# Altium PCB FPC_15015_0451.PcbDoc
Units mil, origin at the board's own origin, x right, y up, seen from the top; angles counter-clockwise.
Board outline 4000 x 614.17 mil, 1 copper layers (Top Layer), stack 2.48 mil thick; 2 components, 51 nets, 102 pads, 0 vias.
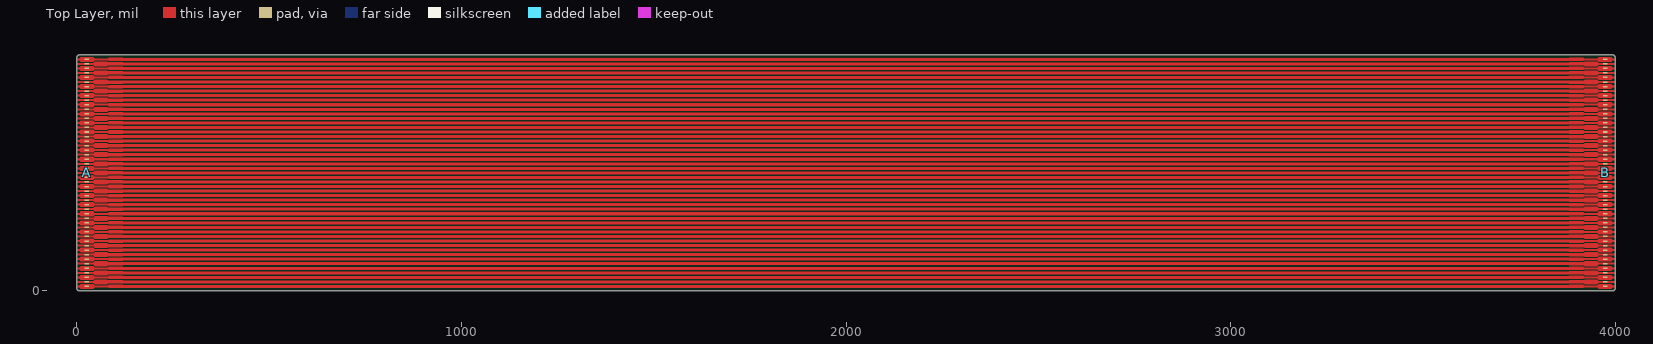
[diagram p0: Top Layer view]
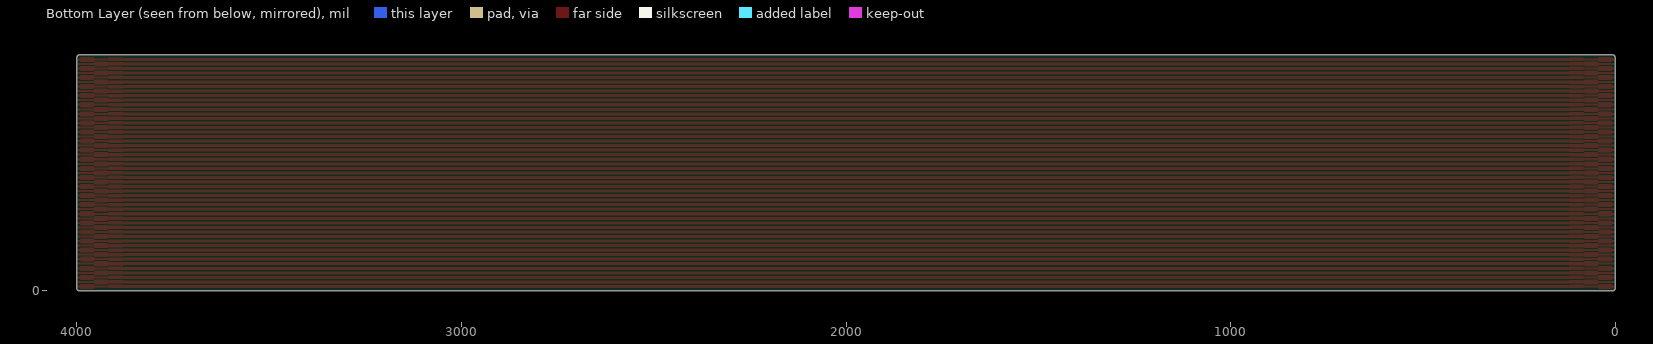
[diagram p1: Bottom Layer view, seen from below]

## Layer stack, top to bottom
Top Solder: solder mask 1.9685, Polyimide coverlay + adhesive, Dk 3.5
Top Layer: signal copper 0.7087
Polyimide base + adhesive: dielectric 1.7717, Polyimide + adhesive, Dk 3.5

## Board outline
7.87,0 3992.13,0 ccw(c3992.13,7.87) 4000,7.87 4000,606.3 ccw(c3992.13,606.3) 3992.13,614.17 7.87,614.17 ccw(c7.87,606.3) 0,606.3 0,7.87 ccw(c7.87,7.87)

## Design rules (kind name [scope] priority, off if disabled: settings)
Clearance [All] p1: gap=2.78 ignorepadtopadclearanceinfootprint=FALSE // Molex staggered fingers: nominal diagonal gap 0.0707107 mm; 0.10 mm straight gap.
PolygonConnect [All] p1: connectstyle=Relief reliefconductorwidth=10 reliefentries=4 polygonreliefangle="90 Angle" airgapwidth=10
RoutingVias [All] p1: holewidth=28 width=50 viastyle="Through Hole" minholewidth=28 minwidth=50 maxholewidth=28 maxwidth=50
SolderMaskExpansion [All] p1: expansion=0 istentingtop=FALSE
Width [All] p1: maxlimit=11.81 minlimit=3.94 preferedwidth=7.87 minimp=50.000000 maximp=50.000000 favimp=50.000000
30 further rules are at their usual default settings.

## Components (designator, comment, footprint, x,y, rotation, side; value= is the part's Value field where it differs from the comment)
A "Integral same-face cable contacts" FPC51_P030_STAGGERED#1 0,307.09 r0 top
B "Integral same-face cable contacts" FPC51_P030_STAGGERED#2 4000,307.09 r0 top

## Footprints (in the part's own frame and the unit in brackets; to place one, negate y for a bottom-side part, rotate by r counter-clockwise, add the part's x,y. Pads: shape width x height; smd on the part's side, far side on the other; paste and mask are expansions set on the pad)
FPC51_P030_STAGGERED#1 [mm]
  rect 0.3x0.1 smd paste-2539.97 mask+0: 1(0.65,-7.5) 2(0.65,-7.2) 3(0.65,-6.9) 4(0.65,-6.6) 5(0.65,-6.3) 6(0.65,-6) 7(0.65,-5.7) 8(0.65,-5.4) 9(0.65,-5.1) 10(0.65,-4.8) 11(0.65,-4.5) 12(0.65,-4.2) 13(0.65,-3.9) 14(0.65,-3.6) 15(0.65,-3.3) 16(0.65,-3) 17(0.65,-2.7) 18(0.65,-2.4) 19(0.65,-2.1) 20(0.65,-1.8) 21(0.65,-1.5) 22(0.65,-1.2) 23(0.65,-0.9) 24(0.65,-0.6) 25(0.65,-0.3) 26(0.65,0) 27(0.65,0.3) 28(0.65,0.6) 29(0.65,0.9) 30(0.65,1.2) 31(0.65,1.5) 32(0.65,1.8) 33(0.65,2.1) 34(0.65,2.4) 35(0.65,2.7) 36(0.65,3) 37(0.65,3.3) 38(0.65,3.6) 39(0.65,3.9) 40(0.65,4.2) 41(0.65,4.5) 42(0.65,4.8) 43(0.65,5.1) 44(0.65,5.4) 45(0.65,5.7) 46(0.65,6) 47(0.65,6.3) 48(0.65,6.6) 49(0.65,6.9) 50(0.65,7.2) 51(0.65,7.5)
  Top Layer region: 0,7.55 0.15,7.55 0.25,7.65 1.1,7.65 1.2,7.55 2,7.55 2.1,7.6 3.05,7.6 3.05,7.4 2.1,7.4 2,7.45 1.2,7.45 1.1,7.35 0.25,7.35 0.15,7.45 0,7.45
  Top Layer region: 0,7.25 1.1,7.25 1.2,7.35 2,7.35 2.1,7.3 3.05,7.3 3.05,7.1 2.1,7.1 2,7.05 1.2,7.05 1.1,7.15 0,7.15
  Top Layer region: 0,6.95 0.15,6.95 0.25,7.05 1.1,7.05 1.2,6.95 2,6.95 2.1,7 3.05,7 3.05,6.8 2.1,6.8 2,6.85 1.2,6.85 1.1,6.75 0.25,6.75 0.15,6.85 0,6.85
  Top Layer region: 0,6.65 1.1,6.65 1.2,6.75 2,6.75 2.1,6.7 3.05,6.7 3.05,6.5 2.1,6.5 2,6.45 1.2,6.45 1.1,6.55 0,6.55
  Top Layer region: 0,6.35 0.15,6.35 0.25,6.45 1.1,6.45 1.2,6.35 2,6.35 2.1,6.4 3.05,6.4 3.05,6.2 2.1,6.2 2,6.25 1.2,6.25 1.1,6.15 0.25,6.15 0.15,6.25 0,6.25
  Top Layer region: 0,6.05 1.1,6.05 1.2,6.15 2,6.15 2.1,6.1 3.05,6.1 3.05,5.9 2.1,5.9 2,5.85 1.2,5.85 1.1,5.95 0,5.95
  Top Layer region: 0,5.75 0.15,5.75 0.25,5.85 1.1,5.85 1.2,5.75 2,5.75 2.1,5.8 3.05,5.8 3.05,5.6 2.1,5.6 2,5.65 1.2,5.65 1.1,5.55 0.25,5.55 0.15,5.65 0,5.65
  Top Layer region: 0,5.45 1.1,5.45 1.2,5.55 2,5.55 2.1,5.5 3.05,5.5 3.05,5.3 2.1,5.3 2,5.25 1.2,5.25 1.1,5.35 0,5.35
  Top Layer region: 0,5.15 0.15,5.15 0.25,5.25 1.1,5.25 1.2,5.15 2,5.15 2.1,5.2 3.05,5.2 3.05,5 2.1,5 2,5.05 1.2,5.05 1.1,4.95 0.25,4.95 0.15,5.05 0,5.05
  Top Layer region: 0,4.85 1.1,4.85 1.2,4.95 2,4.95 2.1,4.9 3.05,4.9 3.05,4.7 2.1,4.7 2,4.65 1.2,4.65 1.1,4.75 0,4.75
  Top Layer region: 0,4.55 0.15,4.55 0.25,4.65 1.1,4.65 1.2,4.55 2,4.55 2.1,4.6 3.05,4.6 3.05,4.4 2.1,4.4 2,4.45 1.2,4.45 1.1,4.35 0.25,4.35 0.15,4.45 0,4.45
  Top Layer region: 0,4.25 1.1,4.25 1.2,4.35 2,4.35 2.1,4.3 3.05,4.3 3.05,4.1 2.1,4.1 2,4.05 1.2,4.05 1.1,4.15 0,4.15
  Top Layer region: 0,3.95 0.15,3.95 0.25,4.05 1.1,4.05 1.2,3.95 2,3.95 2.1,4 3.05,4 3.05,3.8 2.1,3.8 2,3.85 1.2,3.85 1.1,3.75 0.25,3.75 0.15,3.85 0,3.85
  Top Layer region: 0,3.65 1.1,3.65 1.2,3.75 2,3.75 2.1,3.7 3.05,3.7 3.05,3.5 2.1,3.5 2,3.45 1.2,3.45 1.1,3.55 0,3.55
  Top Layer region: 0,3.35 0.15,3.35 0.25,3.45 1.1,3.45 1.2,3.35 2,3.35 2.1,3.4 3.05,3.4 3.05,3.2 2.1,3.2 2,3.25 1.2,3.25 1.1,3.15 0.25,3.15 0.15,3.25 0,3.25
  Top Layer region: 0,3.05 1.1,3.05 1.2,3.15 2,3.15 2.1,3.1 3.05,3.1 3.05,2.9 2.1,2.9 2,2.85 1.2,2.85 1.1,2.95 0,2.95
  Top Layer region: 0,2.75 0.15,2.75 0.25,2.85 1.1,2.85 1.2,2.75 2,2.75 2.1,2.8 3.05,2.8 3.05,2.6 2.1,2.6 2,2.65 1.2,2.65 1.1,2.55 0.25,2.55 0.15,2.65 0,2.65
  Top Layer region: 0,2.45 1.1,2.45 1.2,2.55 2,2.55 2.1,2.5 3.05,2.5 3.05,2.3 2.1,2.3 2,2.25 1.2,2.25 1.1,2.35 0,2.35
  Top Layer region: 0,2.15 0.15,2.15 0.25,2.25 1.1,2.25 1.2,2.15 2,2.15 2.1,2.2 3.05,2.2 3.05,2 2.1,2 2,2.05 1.2,2.05 1.1,1.95 0.25,1.95 0.15,2.05 0,2.05
  Top Layer region: 0,1.85 1.1,1.85 1.2,1.95 2,1.95 2.1,1.9 3.05,1.9 3.05,1.7 2.1,1.7 2,1.65 1.2,1.65 1.1,1.75 0,1.75
  Top Layer region: 0,1.55 0.15,1.55 0.25,1.65 1.1,1.65 1.2,1.55 2,1.55 2.1,1.6 3.05,1.6 3.05,1.4 2.1,1.4 2,1.45 1.2,1.45 1.1,1.35 0.25,1.35 0.15,1.45 0,1.45
  Top Layer region: 0,1.25 1.1,1.25 1.2,1.35 2,1.35 2.1,1.3 3.05,1.3 3.05,1.1 2.1,1.1 2,1.05 1.2,1.05 1.1,1.15 0,1.15
  Top Layer region: 0,0.95 0.15,0.95 0.25,1.05 1.1,1.05 1.2,0.95 2,0.95 2.1,1 3.05,1 3.05,0.8 2.1,0.8 2,0.85 1.2,0.85 1.1,0.75 0.25,0.75 0.15,0.85 0,0.85
  Top Layer region: 0,0.65 1.1,0.65 1.2,0.75 2,0.75 2.1,0.7 3.05,0.7 3.05,0.5 2.1,0.5 2,0.45 1.2,0.45 1.1,0.55 0,0.55
  Top Layer region: 0,0.35 0.15,0.35 0.25,0.45 1.1,0.45 1.2,0.35 2,0.35 2.1,0.4 3.05,0.4 3.05,0.2 2.1,0.2 2,0.25 1.2,0.25 1.1,0.15 0.25,0.15 0.15,0.25 0,0.25
  Top Layer region: 0,0.05 1.1,0.05 1.2,0.15 2,0.15 2.1,0.1 3.05,0.1 3.05,-0.1 2.1,-0.1 2,-0.15 1.2,-0.15 1.1,-0.05 0,-0.05
  Top Layer region: 0,-0.25 0.15,-0.25 0.25,-0.15 1.1,-0.15 1.2,-0.25 2,-0.25 2.1,-0.2 3.05,-0.2 3.05,-0.4 2.1,-0.4 2,-0.35 1.2,-0.35 1.1,-0.45 0.25,-0.45 0.15,-0.35 0,-0.35
  Top Layer region: 0,-0.55 1.1,-0.55 1.2,-0.45 2,-0.45 2.1,-0.5 3.05,-0.5 3.05,-0.7 2.1,-0.7 2,-0.75 1.2,-0.75 1.1,-0.65 0,-0.65
  Top Layer region: 0,-0.85 0.15,-0.85 0.25,-0.75 1.1,-0.75 1.2,-0.85 2,-0.85 2.1,-0.8 3.05,-0.8 3.05,-1 2.1,-1 2,-0.95 1.2,-0.95 1.1,-1.05 0.25,-1.05 0.15,-0.95 0,-0.95
  Top Layer region: 0,-1.15 1.1,-1.15 1.2,-1.05 2,-1.05 2.1,-1.1 3.05,-1.1 3.05,-1.3 2.1,-1.3 2,-1.35 1.2,-1.35 1.1,-1.25 0,-1.25
  Top Layer region: 0,-1.45 0.15,-1.45 0.25,-1.35 1.1,-1.35 1.2,-1.45 2,-1.45 2.1,-1.4 3.05,-1.4 3.05,-1.6 2.1,-1.6 2,-1.55 1.2,-1.55 1.1,-1.65 0.25,-1.65 0.15,-1.55 0,-1.55
  Top Layer region: 0,-1.75 1.1,-1.75 1.2,-1.65 2,-1.65 2.1,-1.7 3.05,-1.7 3.05,-1.9 2.1,-1.9 2,-1.95 1.2,-1.95 1.1,-1.85 0,-1.85
  Top Layer region: 0,-2.05 0.15,-2.05 0.25,-1.95 1.1,-1.95 1.2,-2.05 2,-2.05 2.1,-2 3.05,-2 3.05,-2.2 2.1,-2.2 2,-2.15 1.2,-2.15 1.1,-2.25 0.25,-2.25 0.15,-2.15 0,-2.15
  Top Layer region: 0,-2.35 1.1,-2.35 1.2,-2.25 2,-2.25 2.1,-2.3 3.05,-2.3 3.05,-2.5 2.1,-2.5 2,-2.55 1.2,-2.55 1.1,-2.45 0,-2.45
  Top Layer region: 0,-2.65 0.15,-2.65 0.25,-2.55 1.1,-2.55 1.2,-2.65 2,-2.65 2.1,-2.6 3.05,-2.6 3.05,-2.8 2.1,-2.8 2,-2.75 1.2,-2.75 1.1,-2.85 0.25,-2.85 0.15,-2.75 0,-2.75
  Top Layer region: 0,-2.95 1.1,-2.95 1.2,-2.85 2,-2.85 2.1,-2.9 3.05,-2.9 3.05,-3.1 2.1,-3.1 2,-3.15 1.2,-3.15 1.1,-3.05 0,-3.05
  Top Layer region: 0,-3.25 0.15,-3.25 0.25,-3.15 1.1,-3.15 1.2,-3.25 2,-3.25 2.1,-3.2 3.05,-3.2 3.05,-3.4 2.1,-3.4 2,-3.35 1.2,-3.35 1.1,-3.45 0.25,-3.45 0.15,-3.35 0,-3.35
  Top Layer region: 0,-3.55 1.1,-3.55 1.2,-3.45 2,-3.45 2.1,-3.5 3.05,-3.5 3.05,-3.7 2.1,-3.7 2,-3.75 1.2,-3.75 1.1,-3.65 0,-3.65
  Top Layer region: 0,-3.85 0.15,-3.85 0.25,-3.75 1.1,-3.75 1.2,-3.85 2,-3.85 2.1,-3.8 3.05,-3.8 3.05,-4 2.1,-4 2,-3.95 1.2,-3.95 1.1,-4.05 0.25,-4.05 0.15,-3.95 0,-3.95
  Top Layer region: 0,-4.15 1.1,-4.15 1.2,-4.05 2,-4.05 2.1,-4.1 3.05,-4.1 3.05,-4.3 2.1,-4.3 2,-4.35 1.2,-4.35 1.1,-4.25 0,-4.25
  Top Layer region: 0,-4.45 0.15,-4.45 0.25,-4.35 1.1,-4.35 1.2,-4.45 2,-4.45 2.1,-4.4 3.05,-4.4 3.05,-4.6 2.1,-4.6 2,-4.55 1.2,-4.55 1.1,-4.65 0.25,-4.65 0.15,-4.55 0,-4.55
  Top Layer region: 0,-4.75 1.1,-4.75 1.2,-4.65 2,-4.65 2.1,-4.7 3.05,-4.7 3.05,-4.9 2.1,-4.9 2,-4.95 1.2,-4.95 1.1,-4.85 0,-4.85
  Top Layer region: 0,-5.05 0.15,-5.05 0.25,-4.95 1.1,-4.95 1.2,-5.05 2,-5.05 2.1,-5 3.05,-5 3.05,-5.2 2.1,-5.2 2,-5.15 1.2,-5.15 1.1,-5.25 0.25,-5.25 0.15,-5.15 0,-5.15
  Top Layer region: 0,-5.35 1.1,-5.35 1.2,-5.25 2,-5.25 2.1,-5.3 3.05,-5.3 3.05,-5.5 2.1,-5.5 2,-5.55 1.2,-5.55 1.1,-5.45 0,-5.45
  Top Layer region: 0,-5.65 0.15,-5.65 0.25,-5.55 1.1,-5.55 1.2,-5.65 2,-5.65 2.1,-5.6 3.05,-5.6 3.05,-5.8 2.1,-5.8 2,-5.75 1.2,-5.75 1.1,-5.85 0.25,-5.85 0.15,-5.75 0,-5.75
  Top Layer region: 0,-5.95 1.1,-5.95 1.2,-5.85 2,-5.85 2.1,-5.9 3.05,-5.9 3.05,-6.1 2.1,-6.1 2,-6.15 1.2,-6.15 1.1,-6.05 0,-6.05
  Top Layer region: 0,-6.25 0.15,-6.25 0.25,-6.15 1.1,-6.15 1.2,-6.25 2,-6.25 2.1,-6.2 3.05,-6.2 3.05,-6.4 2.1,-6.4 2,-6.35 1.2,-6.35 1.1,-6.45 0.25,-6.45 0.15,-6.35 0,-6.35
  Top Layer region: 0,-6.55 1.1,-6.55 1.2,-6.45 2,-6.45 2.1,-6.5 3.05,-6.5 3.05,-6.7 2.1,-6.7 2,-6.75 1.2,-6.75 1.1,-6.65 0,-6.65
  Top Layer region: 0,-6.85 0.15,-6.85 0.25,-6.75 1.1,-6.75 1.2,-6.85 2,-6.85 2.1,-6.8 3.05,-6.8 3.05,-7 2.1,-7 2,-6.95 1.2,-6.95 1.1,-7.05 0.25,-7.05 0.15,-6.95 0,-6.95
  Top Layer region: 0,-7.15 1.1,-7.15 1.2,-7.05 2,-7.05 2.1,-7.1 3.05,-7.1 3.05,-7.3 2.1,-7.3 2,-7.35 1.2,-7.35 1.1,-7.25 0,-7.25
  Top Layer region: 0,-7.45 0.15,-7.45 0.25,-7.35 1.1,-7.35 1.2,-7.45 2,-7.45 2.1,-7.4 3.05,-7.4 3.05,-7.6 2.1,-7.6 2,-7.55 1.2,-7.55 1.1,-7.65 0.25,-7.65 0.15,-7.55 0,-7.55
FPC51_P030_STAGGERED#2 [mm]
  rect 0.3x0.1 smd paste-2539.97 mask+0: 1(-0.65,-7.5) 2(-0.65,-7.2) 3(-0.65,-6.9) 4(-0.65,-6.6) 5(-0.65,-6.3) 6(-0.65,-6) 7(-0.65,-5.7) 8(-0.65,-5.4) 9(-0.65,-5.1) 10(-0.65,-4.8) 11(-0.65,-4.5) 12(-0.65,-4.2) 13(-0.65,-3.9) 14(-0.65,-3.6) 15(-0.65,-3.3) 16(-0.65,-3) 17(-0.65,-2.7) 18(-0.65,-2.4) 19(-0.65,-2.1) 20(-0.65,-1.8) 21(-0.65,-1.5) 22(-0.65,-1.2) 23(-0.65,-0.9) 24(-0.65,-0.6) 25(-0.65,-0.3) 26(-0.65,0) 27(-0.65,0.3) 28(-0.65,0.6) 29(-0.65,0.9) 30(-0.65,1.2) 31(-0.65,1.5) 32(-0.65,1.8) 33(-0.65,2.1) 34(-0.65,2.4) 35(-0.65,2.7) 36(-0.65,3) 37(-0.65,3.3) 38(-0.65,3.6) 39(-0.65,3.9) 40(-0.65,4.2) 41(-0.65,4.5) 42(-0.65,4.8) 43(-0.65,5.1) 44(-0.65,5.4) 45(-0.65,5.7) 46(-0.65,6) 47(-0.65,6.3) 48(-0.65,6.6) 49(-0.65,6.9) 50(-0.65,7.2) 51(-0.65,7.5)
  Top Layer region: 0,7.55 -0.15,7.55 -0.25,7.65 -1.1,7.65 -1.2,7.55 -2,7.55 -2.1,7.6 -3.05,7.6 -3.05,7.4 -2.1,7.4 -2,7.45 -1.2,7.45 -1.1,7.35 -0.25,7.35 -0.15,7.45 0,7.45
  Top Layer region: 0,7.25 -1.1,7.25 -1.2,7.35 -2,7.35 -2.1,7.3 -3.05,7.3 -3.05,7.1 -2.1,7.1 -2,7.05 -1.2,7.05 -1.1,7.15 0,7.15
  Top Layer region: 0,6.95 -0.15,6.95 -0.25,7.05 -1.1,7.05 -1.2,6.95 -2,6.95 -2.1,7 -3.05,7 -3.05,6.8 -2.1,6.8 -2,6.85 -1.2,6.85 -1.1,6.75 -0.25,6.75 -0.15,6.85 0,6.85
  Top Layer region: 0,6.65 -1.1,6.65 -1.2,6.75 -2,6.75 -2.1,6.7 -3.05,6.7 -3.05,6.5 -2.1,6.5 -2,6.45 -1.2,6.45 -1.1,6.55 0,6.55
  Top Layer region: 0,6.35 -0.15,6.35 -0.25,6.45 -1.1,6.45 -1.2,6.35 -2,6.35 -2.1,6.4 -3.05,6.4 -3.05,6.2 -2.1,6.2 -2,6.25 -1.2,6.25 -1.1,6.15 -0.25,6.15 -0.15,6.25 0,6.25
  Top Layer region: 0,6.05 -1.1,6.05 -1.2,6.15 -2,6.15 -2.1,6.1 -3.05,6.1 -3.05,5.9 -2.1,5.9 -2,5.85 -1.2,5.85 -1.1,5.95 0,5.95
  Top Layer region: 0,5.75 -0.15,5.75 -0.25,5.85 -1.1,5.85 -1.2,5.75 -2,5.75 -2.1,5.8 -3.05,5.8 -3.05,5.6 -2.1,5.6 -2,5.65 -1.2,5.65 -1.1,5.55 -0.25,5.55 -0.15,5.65 0,5.65
  Top Layer region: 0,5.45 -1.1,5.45 -1.2,5.55 -2,5.55 -2.1,5.5 -3.05,5.5 -3.05,5.3 -2.1,5.3 -2,5.25 -1.2,5.25 -1.1,5.35 0,5.35
  Top Layer region: 0,5.15 -0.15,5.15 -0.25,5.25 -1.1,5.25 -1.2,5.15 -2,5.15 -2.1,5.2 -3.05,5.2 -3.05,5 -2.1,5 -2,5.05 -1.2,5.05 -1.1,4.95 -0.25,4.95 -0.15,5.05 0,5.05
  Top Layer region: 0,4.85 -1.1,4.85 -1.2,4.95 -2,4.95 -2.1,4.9 -3.05,4.9 -3.05,4.7 -2.1,4.7 -2,4.65 -1.2,4.65 -1.1,4.75 0,4.75
  Top Layer region: 0,4.55 -0.15,4.55 -0.25,4.65 -1.1,4.65 -1.2,4.55 -2,4.55 -2.1,4.6 -3.05,4.6 -3.05,4.4 -2.1,4.4 -2,4.45 -1.2,4.45 -1.1,4.35 -0.25,4.35 -0.15,4.45 0,4.45
  Top Layer region: 0,4.25 -1.1,4.25 -1.2,4.35 -2,4.35 -2.1,4.3 -3.05,4.3 -3.05,4.1 -2.1,4.1 -2,4.05 -1.2,4.05 -1.1,4.15 0,4.15
  Top Layer region: 0,3.95 -0.15,3.95 -0.25,4.05 -1.1,4.05 -1.2,3.95 -2,3.95 -2.1,4 -3.05,4 -3.05,3.8 -2.1,3.8 -2,3.85 -1.2,3.85 -1.1,3.75 -0.25,3.75 -0.15,3.85 0,3.85
  Top Layer region: 0,3.65 -1.1,3.65 -1.2,3.75 -2,3.75 -2.1,3.7 -3.05,3.7 -3.05,3.5 -2.1,3.5 -2,3.45 -1.2,3.45 -1.1,3.55 0,3.55
  Top Layer region: 0,3.35 -0.15,3.35 -0.25,3.45 -1.1,3.45 -1.2,3.35 -2,3.35 -2.1,3.4 -3.05,3.4 -3.05,3.2 -2.1,3.2 -2,3.25 -1.2,3.25 -1.1,3.15 -0.25,3.15 -0.15,3.25 0,3.25
  Top Layer region: 0,3.05 -1.1,3.05 -1.2,3.15 -2,3.15 -2.1,3.1 -3.05,3.1 -3.05,2.9 -2.1,2.9 -2,2.85 -1.2,2.85 -1.1,2.95 0,2.95
  Top Layer region: 0,2.75 -0.15,2.75 -0.25,2.85 -1.1,2.85 -1.2,2.75 -2,2.75 -2.1,2.8 -3.05,2.8 -3.05,2.6 -2.1,2.6 -2,2.65 -1.2,2.65 -1.1,2.55 -0.25,2.55 -0.15,2.65 0,2.65
  Top Layer region: 0,2.45 -1.1,2.45 -1.2,2.55 -2,2.55 -2.1,2.5 -3.05,2.5 -3.05,2.3 -2.1,2.3 -2,2.25 -1.2,2.25 -1.1,2.35 0,2.35
  Top Layer region: 0,2.15 -0.15,2.15 -0.25,2.25 -1.1,2.25 -1.2,2.15 -2,2.15 -2.1,2.2 -3.05,2.2 -3.05,2 -2.1,2 -2,2.05 -1.2,2.05 -1.1,1.95 -0.25,1.95 -0.15,2.05 0,2.05
  Top Layer region: 0,1.85 -1.1,1.85 -1.2,1.95 -2,1.95 -2.1,1.9 -3.05,1.9 -3.05,1.7 -2.1,1.7 -2,1.65 -1.2,1.65 -1.1,1.75 0,1.75
  Top Layer region: 0,1.55 -0.15,1.55 -0.25,1.65 -1.1,1.65 -1.2,1.55 -2,1.55 -2.1,1.6 -3.05,1.6 -3.05,1.4 -2.1,1.4 -2,1.45 -1.2,1.45 -1.1,1.35 -0.25,1.35 -0.15,1.45 0,1.45
  Top Layer region: 0,1.25 -1.1,1.25 -1.2,1.35 -2,1.35 -2.1,1.3 -3.05,1.3 -3.05,1.1 -2.1,1.1 -2,1.05 -1.2,1.05 -1.1,1.15 0,1.15
  Top Layer region: 0,0.95 -0.15,0.95 -0.25,1.05 -1.1,1.05 -1.2,0.95 -2,0.95 -2.1,1 -3.05,1 -3.05,0.8 -2.1,0.8 -2,0.85 -1.2,0.85 -1.1,0.75 -0.25,0.75 -0.15,0.85 0,0.85
  Top Layer region: 0,0.65 -1.1,0.65 -1.2,0.75 -2,0.75 -2.1,0.7 -3.05,0.7 -3.05,0.5 -2.1,0.5 -2,0.45 -1.2,0.45 -1.1,0.55 0,0.55
  Top Layer region: 0,0.35 -0.15,0.35 -0.25,0.45 -1.1,0.45 -1.2,0.35 -2,0.35 -2.1,0.4 -3.05,0.4 -3.05,0.2 -2.1,0.2 -2,0.25 -1.2,0.25 -1.1,0.15 -0.25,0.15 -0.15,0.25 0,0.25
  Top Layer region: 0,0.05 -1.1,0.05 -1.2,0.15 -2,0.15 -2.1,0.1 -3.05,0.1 -3.05,-0.1 -2.1,-0.1 -2,-0.15 -1.2,-0.15 -1.1,-0.05 0,-0.05
  Top Layer region: 0,-0.25 -0.15,-0.25 -0.25,-0.15 -1.1,-0.15 -1.2,-0.25 -2,-0.25 -2.1,-0.2 -3.05,-0.2 -3.05,-0.4 -2.1,-0.4 -2,-0.35 -1.2,-0.35 -1.1,-0.45 -0.25,-0.45 -0.15,-0.35 0,-0.35
  Top Layer region: 0,-0.55 -1.1,-0.55 -1.2,-0.45 -2,-0.45 -2.1,-0.5 -3.05,-0.5 -3.05,-0.7 -2.1,-0.7 -2,-0.75 -1.2,-0.75 -1.1,-0.65 0,-0.65
  Top Layer region: 0,-0.85 -0.15,-0.85 -0.25,-0.75 -1.1,-0.75 -1.2,-0.85 -2,-0.85 -2.1,-0.8 -3.05,-0.8 -3.05,-1 -2.1,-1 -2,-0.95 -1.2,-0.95 -1.1,-1.05 -0.25,-1.05 -0.15,-0.95 0,-0.95
  Top Layer region: 0,-1.15 -1.1,-1.15 -1.2,-1.05 -2,-1.05 -2.1,-1.1 -3.05,-1.1 -3.05,-1.3 -2.1,-1.3 -2,-1.35 -1.2,-1.35 -1.1,-1.25 0,-1.25
  Top Layer region: 0,-1.45 -0.15,-1.45 -0.25,-1.35 -1.1,-1.35 -1.2,-1.45 -2,-1.45 -2.1,-1.4 -3.05,-1.4 -3.05,-1.6 -2.1,-1.6 -2,-1.55 -1.2,-1.55 -1.1,-1.65 -0.25,-1.65 -0.15,-1.55 0,-1.55
  Top Layer region: 0,-1.75 -1.1,-1.75 -1.2,-1.65 -2,-1.65 -2.1,-1.7 -3.05,-1.7 -3.05,-1.9 -2.1,-1.9 -2,-1.95 -1.2,-1.95 -1.1,-1.85 0,-1.85
  Top Layer region: 0,-2.05 -0.15,-2.05 -0.25,-1.95 -1.1,-1.95 -1.2,-2.05 -2,-2.05 -2.1,-2 -3.05,-2 -3.05,-2.2 -2.1,-2.2 -2,-2.15 -1.2,-2.15 -1.1,-2.25 -0.25,-2.25 -0.15,-2.15 0,-2.15
  Top Layer region: 0,-2.35 -1.1,-2.35 -1.2,-2.25 -2,-2.25 -2.1,-2.3 -3.05,-2.3 -3.05,-2.5 -2.1,-2.5 -2,-2.55 -1.2,-2.55 -1.1,-2.45 0,-2.45
  Top Layer region: 0,-2.65 -0.15,-2.65 -0.25,-2.55 -1.1,-2.55 -1.2,-2.65 -2,-2.65 -2.1,-2.6 -3.05,-2.6 -3.05,-2.8 -2.1,-2.8 -2,-2.75 -1.2,-2.75 -1.1,-2.85 -0.25,-2.85 -0.15,-2.75 0,-2.75
  Top Layer region: 0,-2.95 -1.1,-2.95 -1.2,-2.85 -2,-2.85 -2.1,-2.9 -3.05,-2.9 -3.05,-3.1 -2.1,-3.1 -2,-3.15 -1.2,-3.15 -1.1,-3.05 0,-3.05
  Top Layer region: 0,-3.25 -0.15,-3.25 -0.25,-3.15 -1.1,-3.15 -1.2,-3.25 -2,-3.25 -2.1,-3.2 -3.05,-3.2 -3.05,-3.4 -2.1,-3.4 -2,-3.35 -1.2,-3.35 -1.1,-3.45 -0.25,-3.45 -0.15,-3.35 0,-3.35
  Top Layer region: 0,-3.55 -1.1,-3.55 -1.2,-3.45 -2,-3.45 -2.1,-3.5 -3.05,-3.5 -3.05,-3.7 -2.1,-3.7 -2,-3.75 -1.2,-3.75 -1.1,-3.65 0,-3.65
  Top Layer region: 0,-3.85 -0.15,-3.85 -0.25,-3.75 -1.1,-3.75 -1.2,-3.85 -2,-3.85 -2.1,-3.8 -3.05,-3.8 -3.05,-4 -2.1,-4 -2,-3.95 -1.2,-3.95 -1.1,-4.05 -0.25,-4.05 -0.15,-3.95 0,-3.95
  Top Layer region: 0,-4.15 -1.1,-4.15 -1.2,-4.05 -2,-4.05 -2.1,-4.1 -3.05,-4.1 -3.05,-4.3 -2.1,-4.3 -2,-4.35 -1.2,-4.35 -1.1,-4.25 0,-4.25
  Top Layer region: 0,-4.45 -0.15,-4.45 -0.25,-4.35 -1.1,-4.35 -1.2,-4.45 -2,-4.45 -2.1,-4.4 -3.05,-4.4 -3.05,-4.6 -2.1,-4.6 -2,-4.55 -1.2,-4.55 -1.1,-4.65 -0.25,-4.65 -0.15,-4.55 0,-4.55
  Top Layer region: 0,-4.75 -1.1,-4.75 -1.2,-4.65 -2,-4.65 -2.1,-4.7 -3.05,-4.7 -3.05,-4.9 -2.1,-4.9 -2,-4.95 -1.2,-4.95 -1.1,-4.85 0,-4.85
  Top Layer region: 0,-5.05 -0.15,-5.05 -0.25,-4.95 -1.1,-4.95 -1.2,-5.05 -2,-5.05 -2.1,-5 -3.05,-5 -3.05,-5.2 -2.1,-5.2 -2,-5.15 -1.2,-5.15 -1.1,-5.25 -0.25,-5.25 -0.15,-5.15 0,-5.15
  Top Layer region: 0,-5.35 -1.1,-5.35 -1.2,-5.25 -2,-5.25 -2.1,-5.3 -3.05,-5.3 -3.05,-5.5 -2.1,-5.5 -2,-5.55 -1.2,-5.55 -1.1,-5.45 0,-5.45
  Top Layer region: 0,-5.65 -0.15,-5.65 -0.25,-5.55 -1.1,-5.55 -1.2,-5.65 -2,-5.65 -2.1,-5.6 -3.05,-5.6 -3.05,-5.8 -2.1,-5.8 -2,-5.75 -1.2,-5.75 -1.1,-5.85 -0.25,-5.85 -0.15,-5.75 0,-5.75
  Top Layer region: 0,-5.95 -1.1,-5.95 -1.2,-5.85 -2,-5.85 -2.1,-5.9 -3.05,-5.9 -3.05,-6.1 -2.1,-6.1 -2,-6.15 -1.2,-6.15 -1.1,-6.05 0,-6.05
  Top Layer region: 0,-6.25 -0.15,-6.25 -0.25,-6.15 -1.1,-6.15 -1.2,-6.25 -2,-6.25 -2.1,-6.2 -3.05,-6.2 -3.05,-6.4 -2.1,-6.4 -2,-6.35 -1.2,-6.35 -1.1,-6.45 -0.25,-6.45 -0.15,-6.35 0,-6.35
  Top Layer region: 0,-6.55 -1.1,-6.55 -1.2,-6.45 -2,-6.45 -2.1,-6.5 -3.05,-6.5 -3.05,-6.7 -2.1,-6.7 -2,-6.75 -1.2,-6.75 -1.1,-6.65 0,-6.65
  Top Layer region: 0,-6.85 -0.15,-6.85 -0.25,-6.75 -1.1,-6.75 -1.2,-6.85 -2,-6.85 -2.1,-6.8 -3.05,-6.8 -3.05,-7 -2.1,-7 -2,-6.95 -1.2,-6.95 -1.1,-7.05 -0.25,-7.05 -0.15,-6.95 0,-6.95
  Top Layer region: 0,-7.15 -1.1,-7.15 -1.2,-7.05 -2,-7.05 -2.1,-7.1 -3.05,-7.1 -3.05,-7.3 -2.1,-7.3 -2,-7.35 -1.2,-7.35 -1.1,-7.25 0,-7.25
  Top Layer region: 0,-7.45 -0.15,-7.45 -0.25,-7.35 -1.1,-7.35 -1.2,-7.45 -2,-7.45 -2.1,-7.4 -3.05,-7.4 -3.05,-7.6 -2.1,-7.6 -2,-7.55 -1.2,-7.55 -1.1,-7.65 -0.25,-7.65 -0.15,-7.55 0,-7.55

## Nets (pads, with @x,y where several pads share a name; then routed paths per layer and width w, separated by ;. In a path a pad name is that pad's centre, name@x,y a point inside that pad or via, vN(x,y) a via of type N, cw(c..) or ccw(c..) an arc to the next point about the centre after c; other vN are vias at no path point)
CH01: A.1 B.1 | length 3763.8
  Top Layer w7.87: 118.11,11.81 3881.89,11.81
CH02: A.2 B.2 | length 3763.8
  Top Layer w7.87: 118.11,23.62 3881.89,23.62
CH03: A.3 B.3 | length 3763.8
  Top Layer w7.87: 118.11,35.43 3881.89,35.43
CH04: A.4 B.4 | length 3763.8
  Top Layer w7.87: 118.11,47.24 3881.89,47.24
CH05: A.5 B.5 | length 3763.8
  Top Layer w7.87: 118.11,59.06 3881.89,59.06
CH06: A.6 B.6 | length 3763.8
  Top Layer w7.87: 118.11,70.87 3881.89,70.87
CH07: A.7 B.7 | length 3763.8
  Top Layer w7.87: 118.11,82.68 3881.89,82.68
CH08: A.8 B.8 | length 3763.8
  Top Layer w7.87: 118.11,94.49 3881.89,94.49
CH09: A.9 B.9 | length 3763.8
  Top Layer w7.87: 118.11,106.3 3881.89,106.3
CH10: A.10 B.10 | length 3763.8
  Top Layer w7.87: 118.11,118.11 3881.89,118.11
CH11: A.11 B.11 | length 3763.8
  Top Layer w7.87: 118.11,129.92 3881.89,129.92
CH12: A.12 B.12 | length 3763.8
  Top Layer w7.87: 118.11,141.73 3881.89,141.73
CH13: A.13 B.13 | length 3763.8
  Top Layer w7.87: 118.11,153.54 3881.89,153.54
CH14: A.14 B.14 | length 3763.8
  Top Layer w7.87: 118.11,165.35 3881.89,165.35
CH15: A.15 B.15 | length 3763.8
  Top Layer w7.87: 118.11,177.17 3881.89,177.17
CH16: A.16 B.16 | length 3763.8
  Top Layer w7.87: 118.11,188.98 3881.89,188.98
CH17: A.17 B.17 | length 3763.8
  Top Layer w7.87: 118.11,200.79 3881.89,200.79
CH18: A.18 B.18 | length 3763.8
  Top Layer w7.87: 118.11,212.6 3881.89,212.6
CH19: A.19 B.19 | length 3763.8
  Top Layer w7.87: 118.11,224.41 3881.89,224.41
CH20: A.20 B.20 | length 3763.8
  Top Layer w7.87: 118.11,236.22 3881.89,236.22
CH21: A.21 B.21 | length 3763.8
  Top Layer w7.87: 118.11,248.03 3881.89,248.03
CH22: A.22 B.22 | length 3763.8
  Top Layer w7.87: 118.11,259.84 3881.89,259.84
CH23: A.23 B.23 | length 3763.8
  Top Layer w7.87: 118.11,271.65 3881.89,271.65
CH24: A.24 B.24 | length 3763.8
  Top Layer w7.87: 118.11,283.46 3881.89,283.46
CH25: A.25 B.25 | length 3763.8
  Top Layer w7.87: 118.11,295.28 3881.89,295.28
CH26: A.26 B.26 | length 3763.8
  Top Layer w7.87: 118.11,307.09 3881.89,307.09
CH27: A.27 B.27 | length 3763.8
  Top Layer w7.87: 118.11,318.9 3881.89,318.9
CH28: A.28 B.28 | length 3763.8
  Top Layer w7.87: 118.11,330.71 3881.89,330.71
CH29: A.29 B.29 | length 3763.8
  Top Layer w7.87: 118.11,342.52 3881.89,342.52
CH30: A.30 B.30 | length 3763.8
  Top Layer w7.87: 118.11,354.33 3881.89,354.33
CH31: A.31 B.31 | length 3763.8
  Top Layer w7.87: 118.11,366.14 3881.89,366.14
CH32: A.32 B.32 | length 3763.8
  Top Layer w7.87: 118.11,377.95 3881.89,377.95
CH33: A.33 B.33 | length 3763.8
  Top Layer w7.87: 118.11,389.76 3881.89,389.76
CH34: A.34 B.34 | length 3763.8
  Top Layer w7.87: 118.11,401.57 3881.89,401.57
CH35: A.35 B.35 | length 3763.8
  Top Layer w7.87: 118.11,413.39 3881.89,413.39
CH36: A.36 B.36 | length 3763.8
  Top Layer w7.87: 118.11,425.2 3881.89,425.2
CH37: A.37 B.37 | length 3763.8
  Top Layer w7.87: 118.11,437.01 3881.89,437.01
CH38: A.38 B.38 | length 3763.8
  Top Layer w7.87: 118.11,448.82 3881.89,448.82
CH39: A.39 B.39 | length 3763.8
  Top Layer w7.87: 118.11,460.63 3881.89,460.63
CH40: A.40 B.40 | length 3763.8
  Top Layer w7.87: 118.11,472.44 3881.89,472.44
CH41: A.41 B.41 | length 3763.8
  Top Layer w7.87: 118.11,484.25 3881.89,484.25
CH42: A.42 B.42 | length 3763.8
  Top Layer w7.87: 118.11,496.06 3881.89,496.06
CH43: A.43 B.43 | length 3763.8
  Top Layer w7.87: 118.11,507.87 3881.89,507.87
CH44: A.44 B.44 | length 3763.8
  Top Layer w7.87: 118.11,519.68 3881.89,519.68
CH45: A.45 B.45 | length 3763.8
  Top Layer w7.87: 118.11,531.5 3881.89,531.5
CH46: A.46 B.46 | length 3763.8
  Top Layer w7.87: 118.11,543.31 3881.89,543.31
CH47: A.47 B.47 | length 3763.8
  Top Layer w7.87: 118.11,555.12 3881.89,555.12
CH48: A.48 B.48 | length 3763.8
  Top Layer w7.87: 118.11,566.93 3881.89,566.93
CH49: A.49 B.49 | length 3763.8
  Top Layer w7.87: 118.11,578.74 3881.89,578.74
CH50: A.50 B.50 | length 3763.8
  Top Layer w7.87: 118.11,590.55 3881.89,590.55
CH51: A.51 B.51 | length 3763.8
  Top Layer w7.87: 118.11,602.36 3881.89,602.36

## Silkscreen, mask and mechanical layers (free items; w line width, h text height)
Top Solder:
  region: 3881.89,-0.39 4000,-0.39 4000,614.57 3881.89,614.57
  region: 0,-0.39 118.11,-0.39 118.11,614.57 0,614.57
Mechanical 1:
  text "FPC 15015-0451 | 51 x 0.30 | TYPE A - SAME CONTACT FACE" at 0,748.03 h31.5
  text "101.60 x 15.60 mm | R0.20 corners | 3.00 exposed contacts | 4.00 back stiffeners" at 0,688.98 h31.5
  text "Top Solder = coverlay apertures; Mechanical 2 = back stiffener boundaries. NO PASTE." at 0,-78.74 h31.5
  text "18 um Cu / 45 um PI+adhesive base / 50 um PI+adhesive coverlay. Contact 0.20 +/-0.03 mm." at 0,-137.8 h31.5
Mechanical 2:
  lines w0.79: 0,0 0,614.17 157.48,614.17 157.48,0 0,0 ; 3842.52,0 3842.52,614.17 4000,614.17 4000,0 3842.52,0